# EAGLE board Shield_Semaforo (EAGLE 9.5.1)
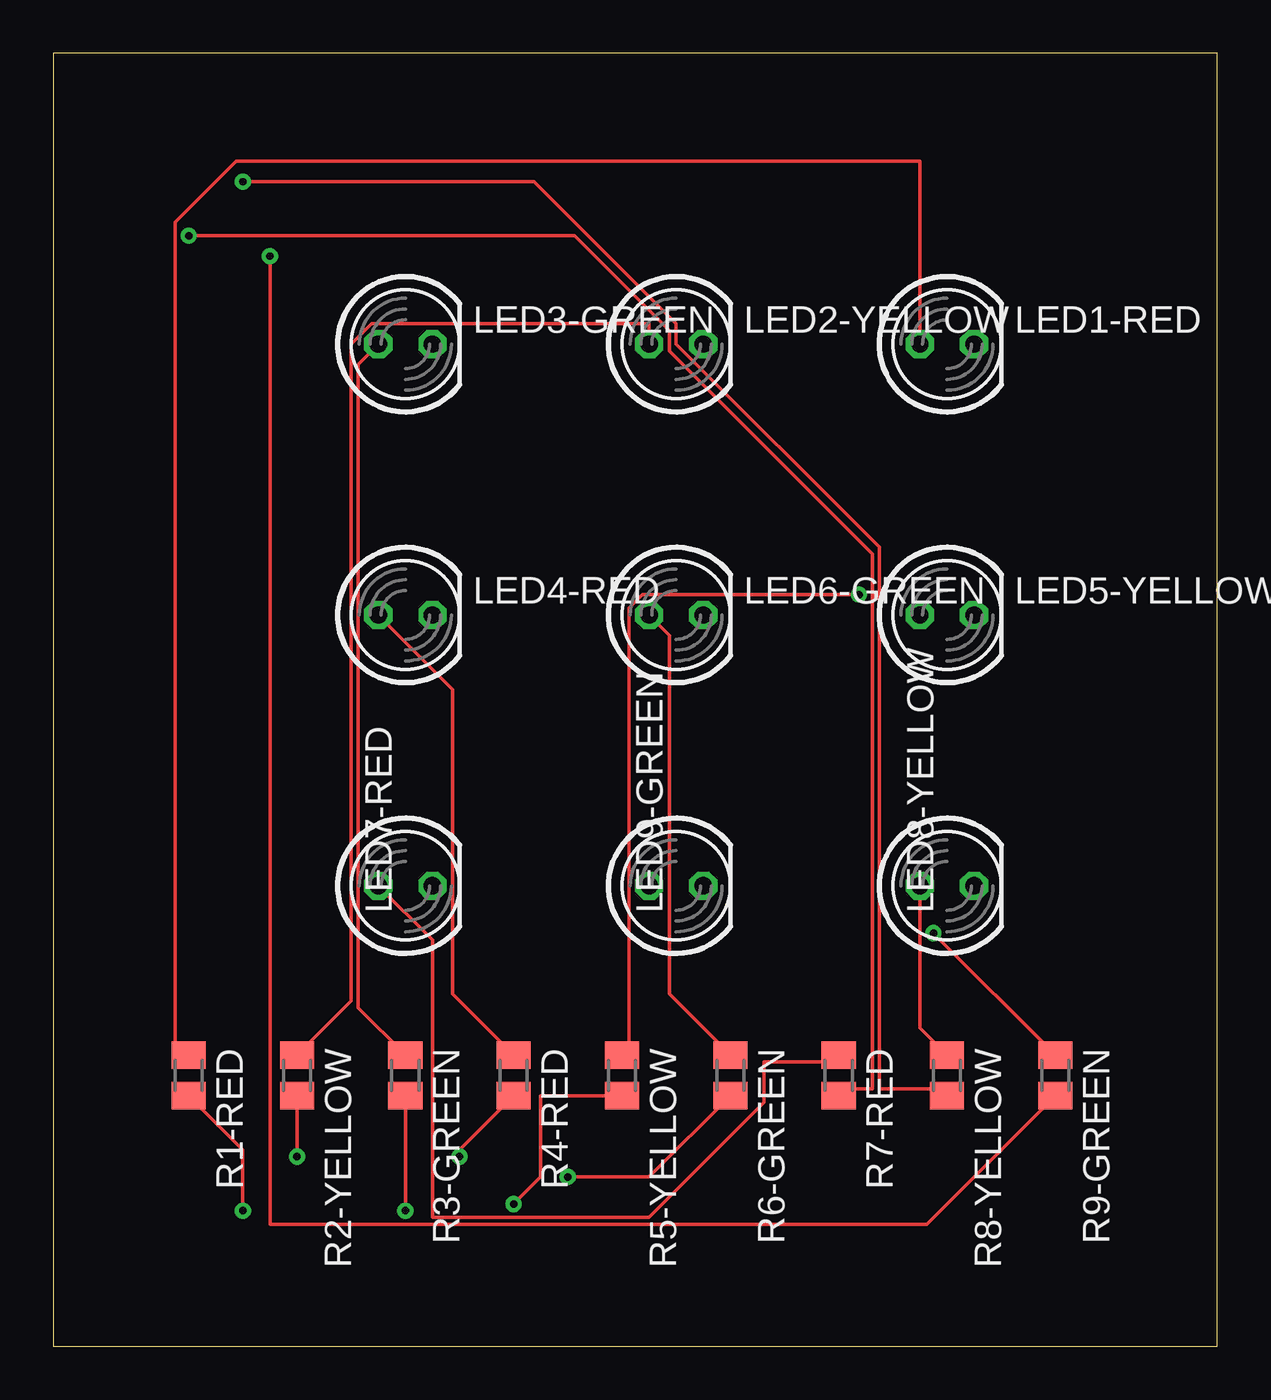
[diagram p0: board, top side]
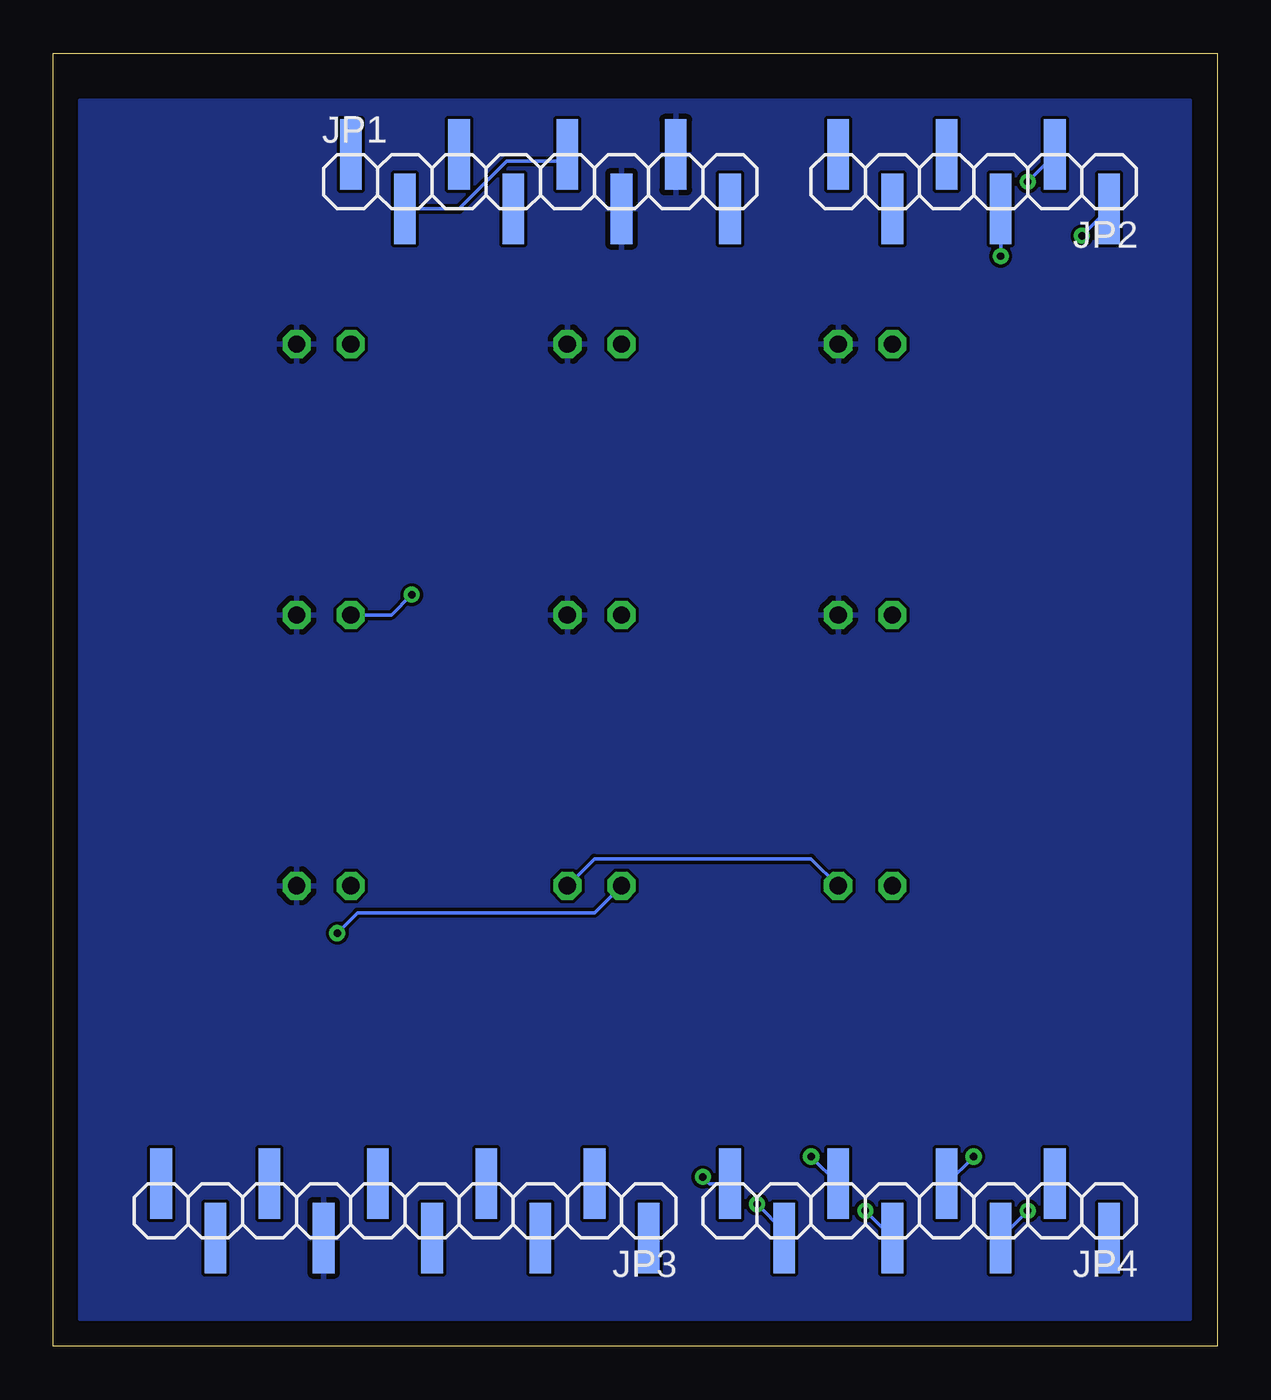
[diagram p1: board, bottom side, seen from below]

Size 54.59 x 60.63 mm. Coordinates in mm from the lower left corner, seen from the top.
Outline: 0,0 54.59,0 54.59,60.63 0,60.63 0,0
Copper layers (1*16): Top 0.035mm / dielectric 1.5mm / Bottom 0.035mm
Design rules "default": minimum track width 6mil, minimum drill 0.35mm, track to track 6mil, track to pad 6mil, pad to pad 6mil, via to via 6mil, smd to smd 6mil, copper to edge 40mil, drill to drill 6mil, minimum pad ring 10mil, minimum via ring 8mil, stop-mask expansion 4mil, vias tented up to drill 0mil, thermal gap 10mil

## Footprints (pad centres in the part's own frame; a part is rotated, then mirrored left to right if it is on the bottom)
1X08SMD = smd 1.016 x 3.302: 1 -1.27,1.27; 2 1.27,-1.27; 3 3.81,1.27; 4 6.35,-1.27; 5 8.89,1.27; 6 11.43,-1.27; 7 13.97,1.27; 8 16.51,-1.27
1X06SMD = smd 1.016 x 3.302: 1 -1.27,1.27; 2 1.27,-1.27; 3 3.81,1.27; 4 6.35,-1.27; 5 8.89,1.27; 6 11.43,-1.27
1X10SMD = smd 1.016 x 3.302: 1 -1.27,1.27; 2 1.27,-1.27; 3 3.81,1.27; 4 6.35,-1.27; 5 8.89,1.27; 6 11.43,-1.27; 7 13.97,1.27; 8 16.51,-1.27; 9 19.05,1.27; 10 21.59,-1.27
LED5MM = drill 0.813 octagon: A -1.27,0; K 1.27,0
M0805 = smd 1.3 x 1.6: 1 -0.95,0; 2 0.95,0

## Placement (x,y rotation side)
JP1  [1X08SMD]  39.37,54.61 0 bottom
JP2  [1X06SMD]  6.35,54.61 180 bottom
JP3  [1X10SMD]  27.94,6.35 180 bottom
JP4  [1X08SMD]  6.35,6.35 180 bottom
LED1-RED  [LED5MM]  41.91,46.99 0 top
LED2-YELLOW  [LED5MM]  29.21,46.99 0 top
LED3-GREEN  [LED5MM]  16.51,46.99 0 top
LED4-RED  [LED5MM]  16.51,34.29 0 top
LED5-YELLOW  [LED5MM]  41.91,34.29 0 top
LED6-GREEN  [LED5MM]  29.21,34.29 0 top
LED7-RED  [LED5MM]  16.51,21.59 0 top
LED8-YELLOW  [LED5MM]  41.91,21.59 0 top
LED9-GREEN  [LED5MM]  29.21,21.59 0 top
R1-RED  220  [M0805]  6.35,12.7 270 top
R2-YELLOW  220  [M0805]  11.43,12.7 270 top
R3-GREEN  220  [M0805]  16.51,12.7 270 top
R4-RED  220  [M0805]  21.59,12.7 270 top
R5-YELLOW  220  [M0805]  26.67,12.7 270 top
R6-GREEN  220  [M0805]  31.75,12.7 270 top
R7-RED  220  [M0805]  36.83,12.7 270 top
R8-YELLOW  220  [M0805]  41.91,12.7 270 top
R9-GREEN  220  [M0805]  46.99,12.7 270 top

## Library data of the parts
JP1-JP4 = pinhead-1
LED1-RED LED2-YELLOW LED3-GREEN LED4-RED LED5-YELLOW LED6-GREEN LED7-RED LED8-YELLOW LED9-GREEN = led
R1-RED R2-YELLOW R3-GREEN R4-RED R5-YELLOW R6-GREEN R7-RED R8-YELLOW R9-GREEN = rcl; SPICEPREFIX: R

## Nets
1_S: JP2.1 R7-RED.2
2_S: JP2.2 R8-YELLOW.2
3_S: JP2.3 R9-GREEN.2
4_S: JP2.4
5_S: JP2.5
5V: JP1.2 JP1.5
6_S: JP2.6
GND: JP1.6 JP1.7 JP3.7 LED1-RED.K LED2-YELLOW.K LED3-GREEN.K LED4-RED.K LED5-YELLOW.K LED6-GREEN.K LED8-YELLOW.K
I2C_SCL: JP3.10
I2C_SDA: JP3.9
MISO: JP3.5
MOSI: JP3.4
N$1: JP1.1
N$2: LED1-RED.A R1-RED.1
N$3: JP1.3
N$4: LED2-YELLOW.A R2-YELLOW.1
N$5: LED3-GREEN.A R3-GREEN.1
N$6: LED4-RED.A R4-RED.1
N$7: LED5-YELLOW.A R5-YELLOW.1
N$8: LED6-GREEN.A R6-GREEN.1
N$16: LED7-RED.A R7-RED.1
N$17: JP3.8
N$18: LED8-YELLOW.A R8-YELLOW.1
N$19: LED9-GREEN.A R9-GREEN.1
N$23: LED7-RED.K LED9-GREEN.K
PORT_11~5V: JP4.3 R1-RED.2
PORT_12~5V: JP4.8 R6-GREEN.2
PORT_13~5V: JP4.7 R5-YELLOW.2
PWM_1~5V: JP4.4 R2-YELLOW.2
PWM_2~5V: JP4.5 R3-GREEN.2
PWM_3~5V: JP4.6 R4-RED.2
RX0: JP4.1
SCK: JP3.6
SS: JP3.3
TX0: JP4.2
VDD3: JP1.4
VIN: JP1.8
VN_SENSOR_IN: JP3.2
VP_SENSOR_IN: JP3.1

## Tracks (layer width: path | path; a pad name or v marks a point on that pad's centre or on a via)
1_S  (via drill 0.35)
  Top 0.152: v6.35,52.07 24.45,52.07 28.89,47.62 28.89,46.67 38.42,37.15 38.42,12.06 36.83,12.06 R7-RED.2
  Bottom 0.152: JP2.1 v6.35,52.07
2_S  (via drill 0.35)
  Top 0.152: v8.89,54.61 22.54,54.61 29.21,47.94 29.21,46.99 38.73,37.47 38.73,12.06 41.91,12.06 R8-YELLOW.2
  Bottom 0.152: JP2.2 v8.89,54.61
3_S  (via drill 0.35)
  Top 0.152: v10.16,51.12 10.16,5.71 40.96,5.71 R9-GREEN.2
  Bottom 0.152: JP2.3 v10.16,51.12
5V
  Bottom 0.152: JP1.5 30.8,55.56 33.34,55.56 35.56,53.34 JP1.2
GND
  pour Bottom: 1.27,58.42 1.27,1.27 53.34,1.27 53.34,58.42
N$2
  Top 0.152: LED1-RED.A 40.64,55.56 8.57,55.56 5.71,52.7 5.71,14.29 R1-RED.1
N$4
  Top 0.152: LED2-YELLOW.A 27.94,47.94 14.92,47.94 13.97,46.99 13.97,16.19 R2-YELLOW.1
N$5
  Top 0.152: LED3-GREEN.A 14.29,46.04 14.29,15.88 R3-GREEN.1
N$6
  Top 0.152: LED4-RED.A 18.73,30.8 18.73,16.51 R4-RED.1
N$7  (via drill 0.35)
  Top 0.152: v37.78,35.24 27.62,35.24 26.99,34.61 26.99,13.97 R5-YELLOW.1
  Bottom 0.152: v37.78,35.24 38.73,34.29 LED5-YELLOW.A
N$8
  Top 0.152: LED6-GREEN.A 28.89,33.34 28.89,16.51 R6-GREEN.1
N$16
  Top 0.152: LED7-RED.A 17.78,19.05 17.78,6.03 27.94,6.03 33.34,11.43 33.34,13.34 36.83,13.34 R7-RED.1
N$18
  Top 0.152: LED8-YELLOW.A 40.64,14.92 R8-YELLOW.1
N$19  (via drill 0.35)
  Top 0.152: v41.27,19.37 R9-GREEN.1
  Bottom 0.152: v41.27,19.37 40.32,20.32 29.21,20.32 LED9-GREEN.A
N$23
  Bottom 0.152: LED7-RED.K 19.05,22.86 29.21,22.86 LED9-GREEN.K
PORT_11~5V  (via drill 0.35)
  Top 0.152: v8.89,6.35 8.89,9.21 R1-RED.2
  Bottom 0.152: JP4.3 v8.89,6.35
PORT_12~5V  (via drill 0.35)
  Top 0.152: v24.13,7.94 27.94,7.94 R6-GREEN.2
  Bottom 0.152: v24.13,7.94 23.81,7.62 JP4.8
PORT_13~5V  (via drill 0.35)
  Top 0.152: v21.59,6.67 22.86,7.94 22.86,11.75 R5-YELLOW.2
  Bottom 0.152: v21.59,6.67 20.32,5.4 JP4.7
PWM_1~5V  (via drill 0.35)
  Top 0.152: v11.43,8.89 R2-YELLOW.2
  Bottom 0.152: JP4.4 v11.43,8.89
PWM_2~5V  (via drill 0.35)
  Top 0.152: v16.51,6.35 R3-GREEN.2
  Bottom 0.152: JP4.5 v16.51,6.35
PWM_3~5V  (via drill 0.35)
  Top 0.152: v19.05,8.89 19.05,9.21 R4-RED.2
  Bottom 0.152: JP4.6 v19.05,8.89